# Altium PCB RA08T.PcbDoc
Units mm, origin at the board's own origin, x right, y up, seen from the top; angles counter-clockwise.
Board outline 67 x 42 mm, 2 copper layers (TOP, BOTTOM), stack 1.486 mm thick; 24 components, 20 nets, 92 pads, 159 vias.
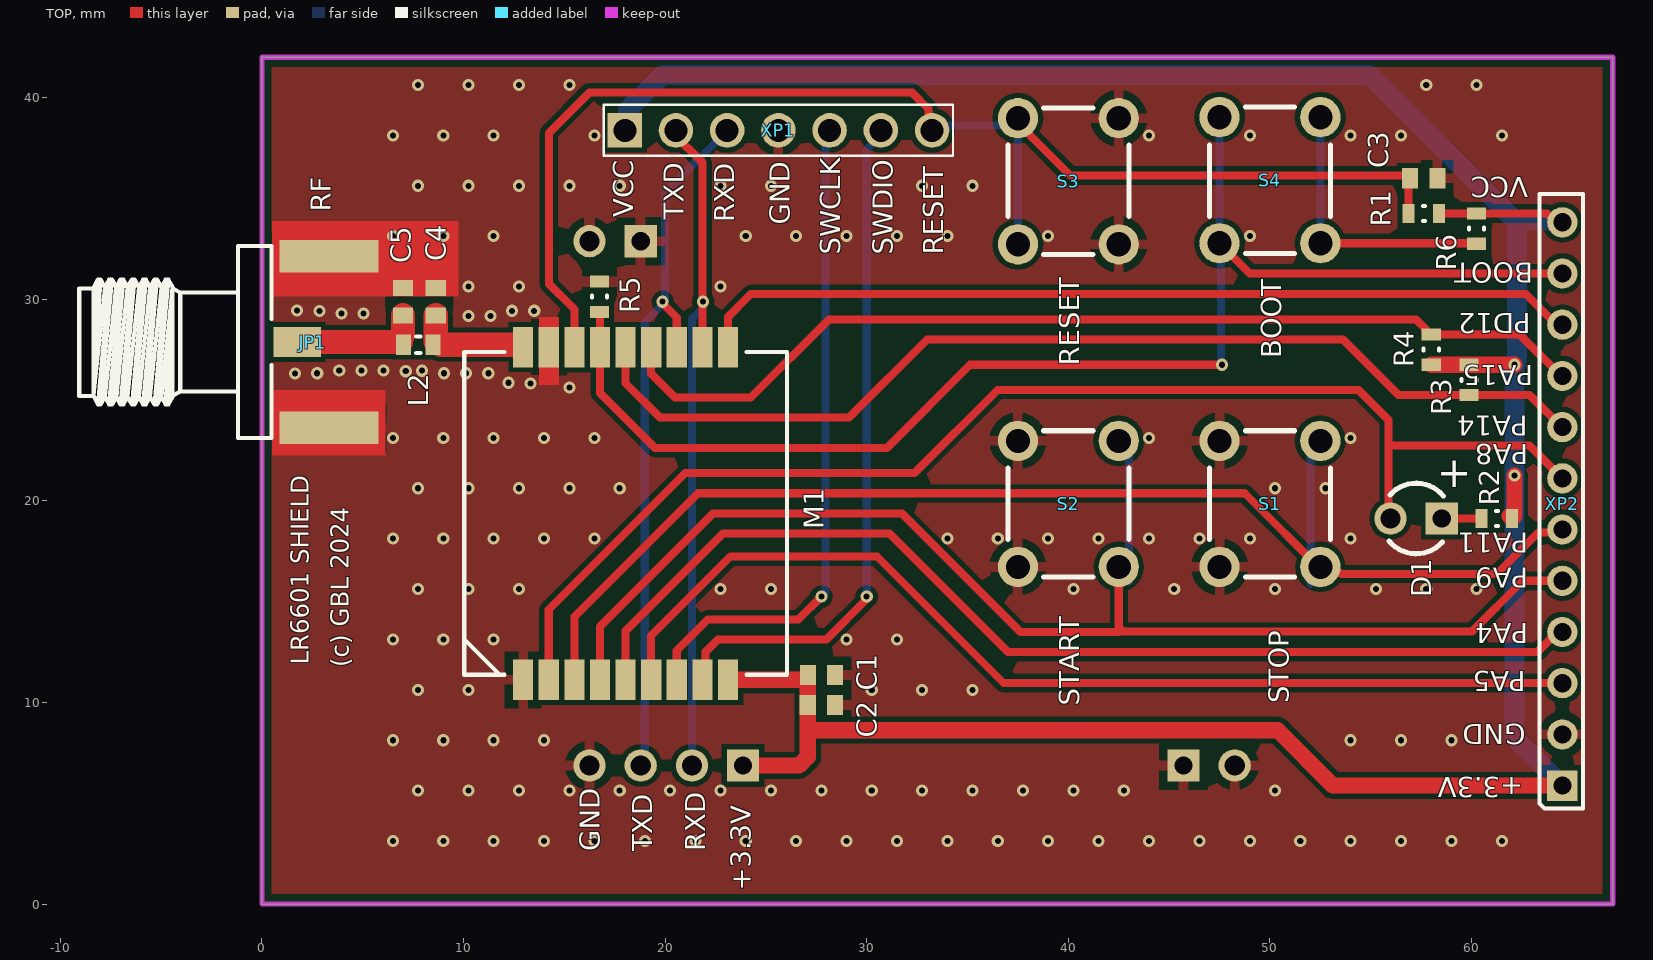
[diagram p0: TOP view]
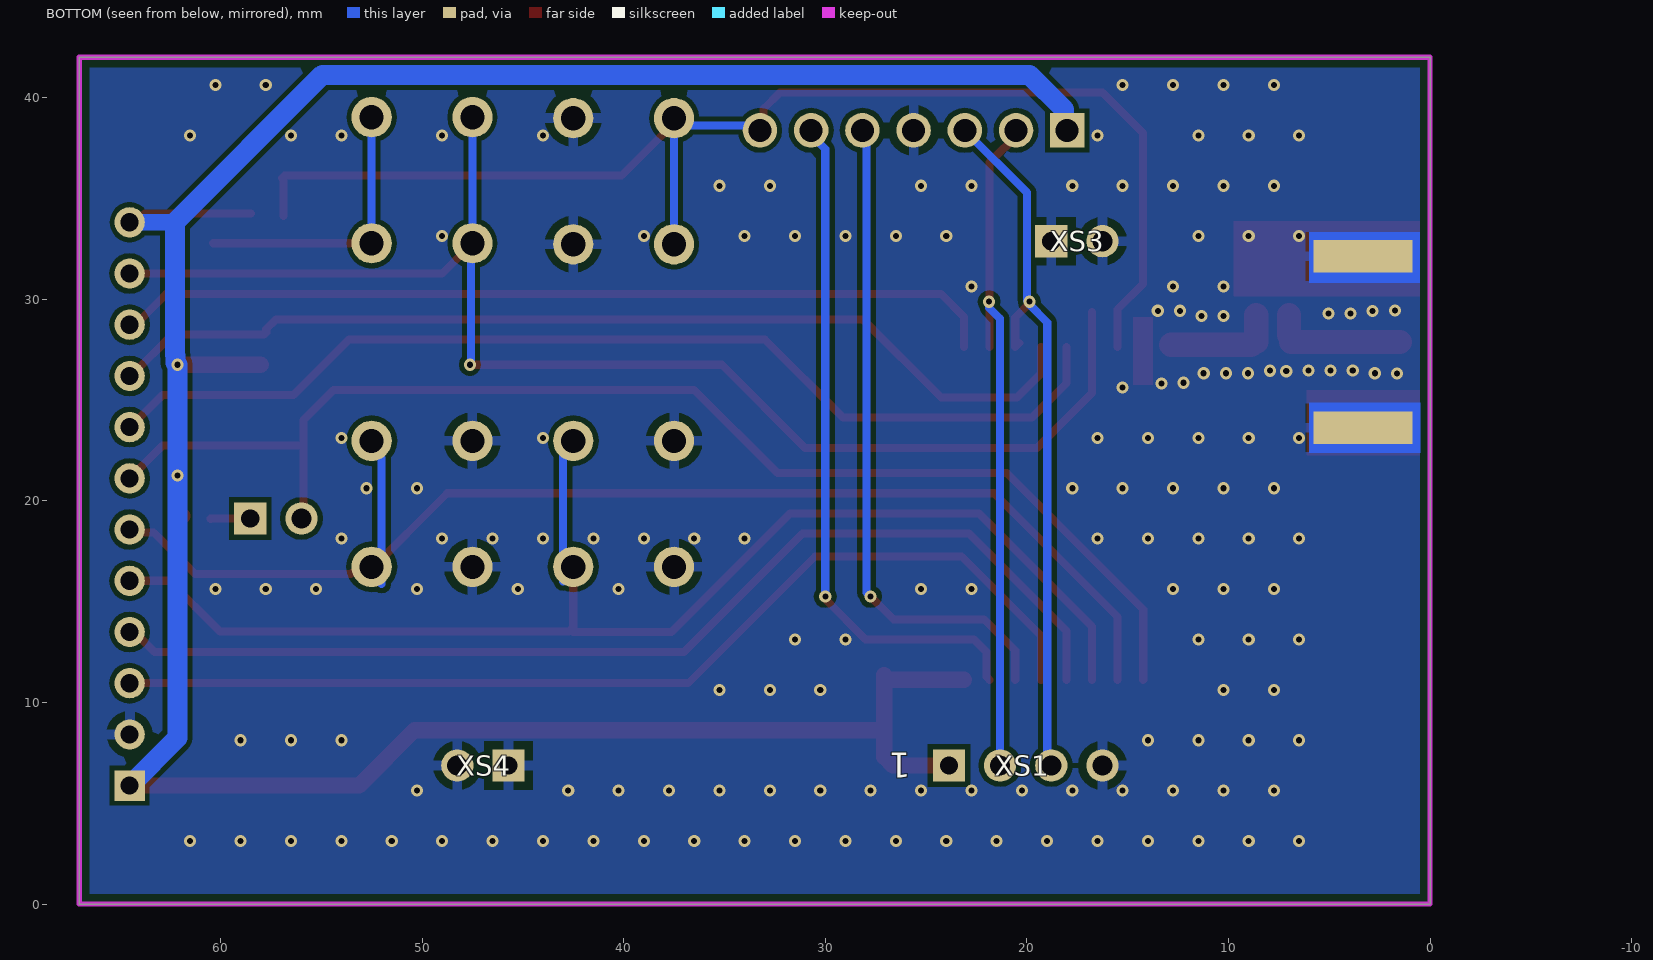
[diagram p1: BOTTOM view, seen from below]
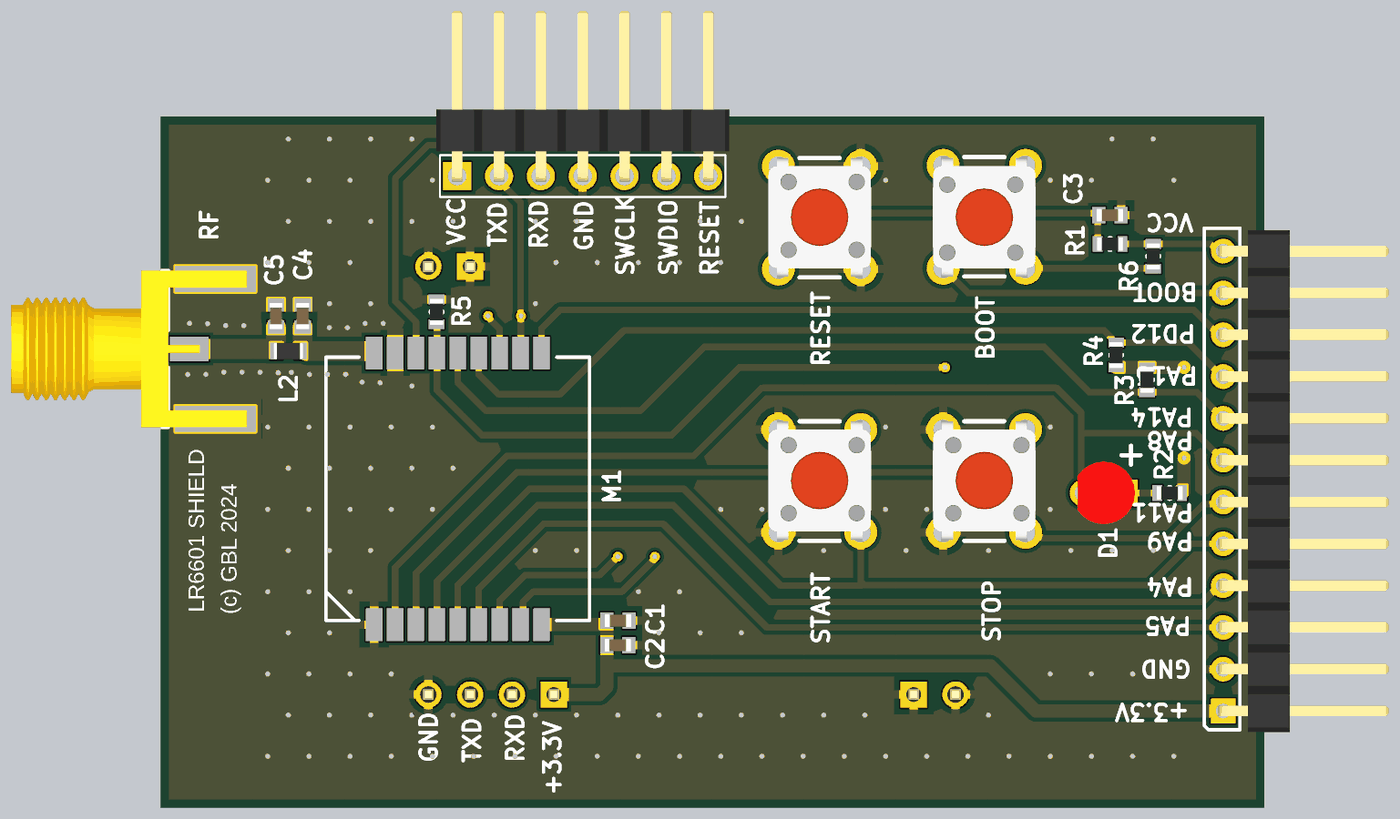
[diagram p2: 3D render of the assembled board from above, using the file's embedded part models]
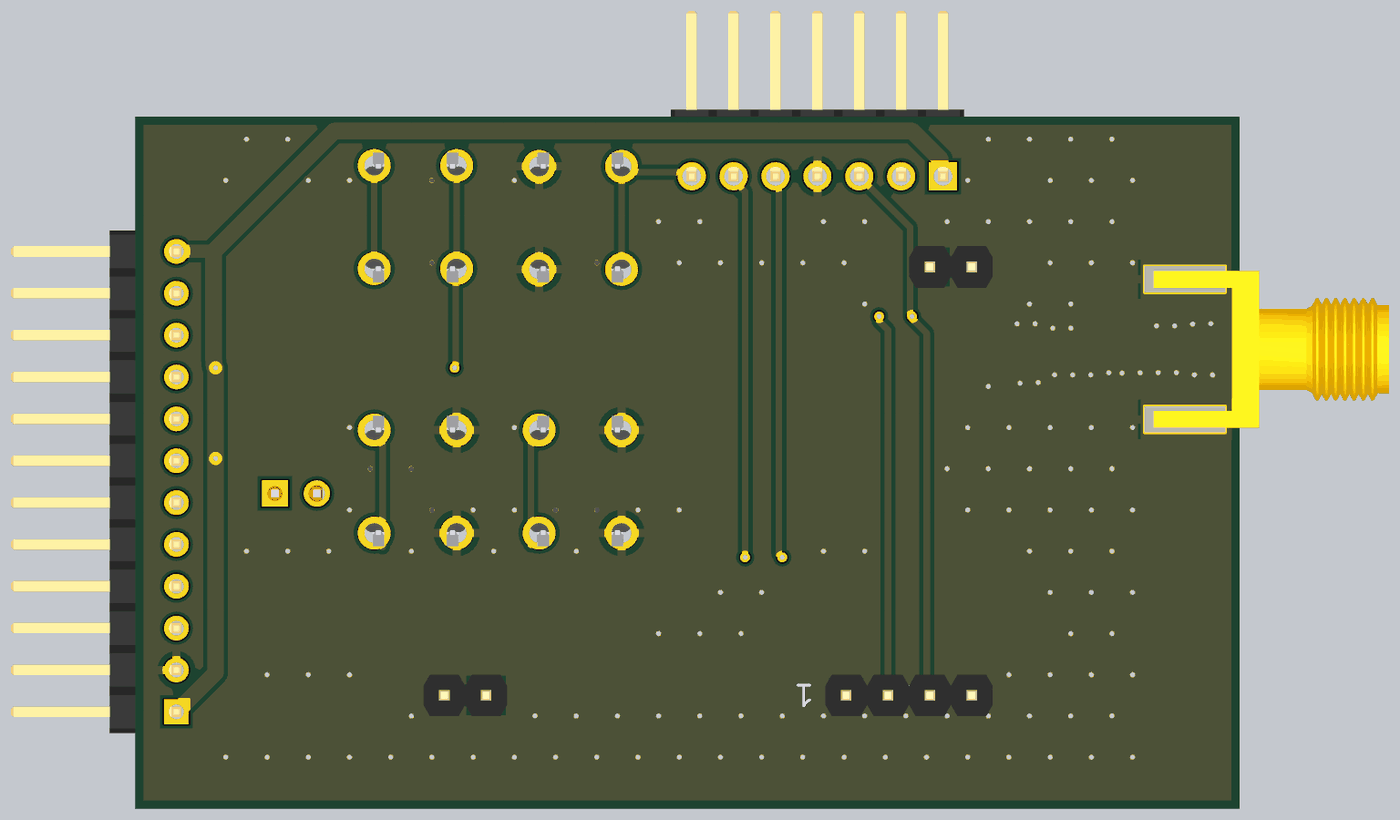
[diagram p3: 3D render of the assembled board from below, using the file's embedded part models]

## Layer stack, top to bottom
Top Solder: solder mask 0.0102, Solder Resist, Dk 3.5
TOP: signal copper 0.018
Dielectric1: core 1.45, FR-4, Dk 4.2
BOTTOM: signal copper 0.018
Bottom Solder: solder mask 0.0102, Solder Resist, Dk 3.5

## Board outline
0,0 67,0 67,42 0,42

## Design rules (kind name [scope] priority, off if disabled: settings)
AssemblyTestPointUsage [All] p1 off:
AssemblyTestpoint [All] p1 off: testpointundercomponent=TRUE minsize=1.016 maxsize=2.54 preferedsize=1.524 minholesize=0 maxholesize=1.016 preferedholesize=0.813 testpointgrid=0.025 usegrid=TRUE gridtolerance=0 allowsidetop=TRUE allowsidebottom=TRUE
BoardOutlineClearance [All] p1: gap=0.5 ignorepadtopadclearanceinfootprint=FALSE
Clearance Clearance_Polygon [InPolygon] p1: gap=0.25 ignorepadtopadclearanceinfootprint=FALSE
Clearance [All] p2: gap=0.2 ignorepadtopadclearanceinfootprint=FALSE
ComponentClearance [All] p1: gap=-5 collisioncheckmode=3 verticalgap=-5 showdistances=TRUE
FabricationTestPointUsage [All] p1 off: valid=0 allowmultiple=FALSE
FabricationTestpoint [All] p1 off: side=3 testpointundercomponent=TRUE minsize=1.016 maxsize=2.54 preferedsize=1.524 minholesize=0 maxholesize=1.016 preferedholesize=0.813 testpointgrid=0.025 allowsidetop=TRUE allowsidebottom=TRUE usegrid=TRUE gridtolerance=0
HoleSize [All] p1: absolutevalues=TRUE maxlimit=8 minlimit=0.025 maxpercent=80.000 minpercent=20.000
HoleToHoleClearance [All] p1: gap=0.25 allowstackedmicrovias=TRUE
MinimumSolderMaskSliver [All] p1: minsoldermaskwidth=0
PlaneClearance [All] p1: clearance=0.5
PlaneConnect [All] p1: planeconnectstyle=Relief reliefexpansion=0.5 reliefentries=4 reliefconductorwidth=0.5 reliefairgap=0.5
PolygonConnect PolygonConnect_1 [All vs (InComponent('C4') AND InComponent('C5'))] p1: thpad.connectstyle=Relief thpad.reliefconductorwidth=0.25 thpad.reliefentries=4 thpad.polygonreliefangle="90 Angle" thpad.airgapwidth=0.25 smdpad.connectstyle=Direct smdpad.reliefconductorwidth=0.254 smdpad.reliefentries=4 smdpad.polygonreliefangle="90 Angle" smdpad.airgapwidth=0.254 via.connectstyle=Direct via.reliefconductorwidth=0.254 via.reliefentries=4 via.polygonreliefangle="90 Angle" via.airgapwidth=0.254
PolygonConnect PolygonConnect_via [isVia] p2: connectstyle=Direct reliefconductorwidth=0.254 reliefentries=4 polygonreliefangle="90 Angle" airgapwidth=0.254
PolygonConnect [All] p3: connectstyle=Relief reliefconductorwidth=0.5 reliefentries=4 polygonreliefangle="90 Angle" airgapwidth=0.4
RoutingCorners [All] p1: cornerstyle=45-Degree minsetback=2.5 maxsetback=2.5
RoutingVias [All] p1: holewidth=0.3 width=0.7 viastyle="Through Hole" minholewidth=0.2 minwidth=0.5 maxholewidth=0.4 maxwidth=0.8
SilkToSilkClearance [All] p1: silktosilkclearance=0
SilkToSolderMaskClearance [IsPad] p1: minsilkscreentomaskgap=-1 clearancetoexposedcopper=TRUE
SolderMaskExpansion [All] p1: expansion=0.1 istentingtop=FALSE
Width [All] p1: maxlimit=2 minlimit=0.15 preferedwidth=0.2 minimp=50.000000 maximp=50.000000 favimp=50.000000
17 further rules are at their usual default settings.

## Components (designator, comment, footprint, x,y, rotation, side; value= is the part's Value field where it differs from the comment)
C1 "1u" C-0603 27.759,11.362 r0 top
C2 "1n" C-0603 27.75,9.875 r0 top
C3 "100n" C-0603 57.625,36 r0 top
C4 "nc" C-0603 8.625,29.875 r90 top
C5 "nc" C-0603 7,29.875 r90 top
D1 "LED3mm" LED_3mm_RED 57.25,19.125 r180 top value=GREEN
JP1 "EM-SA071-GGT" AMPHENOL_132357-11 1.75,27.875 r0 top
L2 "0" L-0603 7.758,27.745 r180 top
M1 "RA-08" LGA18_RA08 18.04,19.375 r90 top
R1 "1k" R-0603 57.63,34.248 r0 top
R2 "1k" R-0603 61.25,19.125 r0 top
R3 "10k" R-0603 59.875,26 r90 top
R4 "10k" R-0603 58,27.5 r270 top
R5 "100k" R-0603 16.75,30.125 r90 top
R6 "1k" R-0603 60.25,33.5 r270 top
S1 "KLS7-TS3602 -3 15-180" BUTT_MIN 50,19.875 r90 top locked
S2 "KLS7-TS3602 -3 15-180" BUTT_MIN 40,19.875 r90 top locked
S3 "KLS7-TS3602 -3 15-180" BUTT_MIN 40,35.875 r90 top locked
S4 "KLS7-TS3602 -3 15-180" BUTT_MIN 50,35.875 r270 top locked
XP1 "Header 7" PLS1-7R 18,38.375 r0 top locked
XP2 "Header 12H" HDR1X12H_1 64.5,5.875 r90 top
XS1 "PLS4" "PLS4 - 3D" 23.87,6.875 r180 bottom locked value={Value}
XS3 "PLS2" "PLS2 - 3D" 18.79,32.875 r180 bottom locked value={Value}
XS4 "PLS2" "PLS2 - 3D" 45.71,6.875 r0 bottom locked value={Value}

## Footprints (in the part's own frame and the unit in brackets; to place one, negate y for a bottom-side part, rotate by r counter-clockwise, add the part's x,y. Pads: shape width x height; smd on the part's side, far side on the other; paste and mask are expansions set on the pad)
AMPHENOL_132357-11 [mm] "SMA End Launch Jack for 1.58mm PCB, 50 Ohm, Flat Tab Contact"
  rect 2.35x1.5 smd: 1(0,0)
  rect 4.9x1.6 smd far side: 2(1.575,-4.25) 2(1.575,4.25)
  rect 4.9x1.6 smd: 2(1.575,-4.25) 2(1.575,4.25)
  silkscreen extent -10.81,-4.76 -1.28,4.76, body extent -10.8,-4.76 3.48,4.76, height 4.08
BUTT_MIN [mm]
  round 2 hole 1.2 mask+0.05: 1(-3.15,-2.5) 1(3.1,-2.5) 2(-3.15,2.5) 2(3.1,2.5)
  silkscreen extent -3.66,-3 3.6,3, body extent -3.95,-3.1 3.95,3.1, height 7.01
C-0603 [mm] "Chip Capacitor, 2-Leads, Body 1,60x0,80mm, IPC Medium Density"
  rect 0.8x1 smd: 1(-0.675,0) 2(0.675,0)
  body extent -0.8,-0.4 0.8,0.4, height 0.8
HDR1X12H_1 [mm] "Connector; Header; 12 Position; Right Angle"
  rect 1.5x1.5 hole 0.9: 1(0,0)
  round 1.5 hole 0.9: 2(2.54,0) 3(5.08,0) 4(7.62,0) 5(10.16,0) 6(12.7,0) 7(15.24,0) 8(17.78,0) 9(20.32,0) 10(22.86,0) 11(25.4,0) 12(27.94,0)
  silkscreen extent -1.14,-1.02 29.34,1.14, body extent -1.27,-10.04 29.21,0.32, height 2.54
L-0603 [mm] "Chip Inductor, 2-Leads, Body 1,60x0,80mm, IPC Medium Density"
  rect 0.74x1.02 smd: 1(-0.735,0) 2(0.735,0)
  silkscreen extent -0.1,-0.41 0.1,0.41, body extent -0.9,-0.5 0.9,0.5, height 1
LED_3mm_RED [mm]
  rect 1.6x1.6 hole 0.9: 1(-1.27,0)
  round 1.6 hole 1: 2(1.27,0)
  silkscreen extent -1.34,-1.75 1.34,1.75, body extent -1.9,-1.9 1.6,1.9, height 5.75
LGA18_RA08 [mm]
  rect 2x1 smd: 1(-8.25,5.08) 2(-8.25,3.81) 3(-8.25,2.54) 4(-8.25,1.27) 5(-8.25,0) 6(-8.25,-1.27) 7(-8.25,-2.54) 8(-8.25,-3.81) 9(-8.25,-5.08) 10(8.25,-5.08) 11(8.25,-3.81) 12(8.25,-2.54) 13(8.25,-1.27) 14(8.25,0) 15(8.25,1.27) 16(8.25,2.54) 17(8.25,3.81) 18(8.25,5.08)
  silkscreen extent -8,-8 8,8, body extent -7.5,-7.5 7.5,7.53, height 1.5
PLS1-7R [mm] "Header, Vertical, 2.54 mm pitch; 0.70 mm lead width, 7 pins, 1 row, 7 pins per row, 16.51 mm L X 2.54 mm W X 7.54 mm H body"
  rect 1.71x1.71 hole 1.14 paste-1.71: 1(0,0)
  round 1.71 hole 1.14 paste-1.71: 2(2.54,0) 3(5.08,0) 4(7.62,0) 5(10.16,0) 6(12.7,0) 7(15.24,0)
  silkscreen extent -1.04,-1.27 16.28,1.27, body extent -1.27,-0.32 16.51,10.04, height 2.54
"PLS2 - 3D" [mm]
  rect 1.6x1.6 hole 0.9: 1(0,0)
  round 1.6 hole 1: 2(2.54,0)
  body extent -1.27,-1.27 3.81,1.27, height 8.8
"PLS4 - 3D" [mm]
  rect 1.6x1.6 hole 0.9: 1(0,0)
  round 1.6 hole 1: 2(2.54,0) 3(5.08,0) 4(7.62,0)
  body extent -1.27,-1.27 8.89,1.27, height 8.8
R-0603 [mm] "Chip Resistor, 2-Leads, Body 1,60x0,82mm, IPC Medium Density"
  rect 0.6x0.95 smd: 1(-0.75,0) 2(0.75,0)
  silkscreen extent -0.05,-0.38 0.05,0.38, body extent -0.8,-0.4 0.8,0.4, height 0.45

## Part data
C1 C2 C3 C4 C5: library part CAPN, Voltage=50V, Вид=Конденсатор, Точність/група=NP0
JP1: library part SMA, "SMA Female R/A PCB Mount", Вид=Роз'єм
L2: library part L, Вид=Індуктивність
R1 R2 R3 R4 R5 R6: library part RES, Вид=Резистор, Точність/група=5%
S1 S2 S3 S4: library part SW-1, Вид=Кнопка
XP1: "Header, 7-Pin", LatestRevisionDate=17-Jul-2002, LatestRevisionNote="Re-released for DXP Platform.", Publisher="Altium Limited"
XP2: "Header, 12-Pin, Right Angle", LatestRevisionDate=17-Jul-2002, LatestRevisionNote="Re-released for DXP Platform.", Publisher="Altium Limited"
D1 XS1 XS3 XS4: Mounting  Method=THT

## Via types
v1: diameter 0.6, hole 0.3, TOP to BOTTOM, tented both sides, 152 vias
v2: diameter 0.6, hole 0.3, TOP to BOTTOM, 7 vias

## Nets (pads, with @x,y where several pads share a name; then routed paths per layer and width w, separated by ;. In a path a pad name is that pad's centre, name@x,y a point inside that pad or via, vN(x,y) a via of type N, cw(c..) or ccw(c..) an arc to the next point about the centre after c; other vN are vias at no path point)
BOOT: M1.15 R5.1 S4.1 XP2.11 | length 67.7
  TOP w0.2: R5.1 R5.1@16.77,29.355
  TOP w0.4: R5.1@16.77,29.355 M1.15 16.77,25.355 19.5,22.625 31,22.625 35.125,26.75 v2(47.625,26.75) ; S4.1@47.5,32.775 49,31.275 XP2.11
  BOTTOM w0.4: S4.1@47.5,39.025 47.5,32.775 47.562,32.712 47.562,26.813 v2(47.625,26.75)
GND: C1.2 C2.2 C3.2 C4.2 C5.2 JP1.2 M1.1 M1.17 R5.2 S1.2 S2.2 S3.1 XP1.4 XP2.2 XS1.4 XS3.1 XS3.2 XS4.1 XS4.2
  other v1: 6.5,3.125 9,3.125 11.5,3.125 14,3.125 16.5,3.125 19,3.125 21.5,3.125 24,3.125 26.5,3.125 29,3.125 31.5,3.125 34,3.125 36.5,3.125 39,3.125 41.5,3.125 44,3.125 46.5,3.125 49,3.125 51.5,3.125 54,3.125 56.5,3.125 59,3.125 61.5,3.125 7.75,5.625 10.25,5.625 12.75,5.625 15.25,5.625 17.75,5.625 20.25,5.625 22.75,5.625 25.25,5.625 27.75,5.625 30.25,5.625 32.75,5.625 35.25,5.625 37.75,5.625 40.25,5.625 42.75,5.625 50.25,5.625 6.5,8.125 9,8.125 11.5,8.125 14,8.125 54,8.125 56.5,8.125 59,8.125 7.75,10.625 10.25,10.625 30.25,10.625 32.75,10.625 35.25,10.625 6.5,13.125 9,13.125 11.5,13.125 29,13.125 31.5,13.125 7.75,15.625 10.25,15.625 12.75,15.625 22.75,15.625 25.25,15.625 40.25,15.625 45.25,15.625 50.25,15.625 55.25,15.625 57.75,15.625 60.25,15.625 6.5,18.125 9,18.125 11.5,18.125 14,18.125 16.5,18.125 34,18.125 36.5,18.125 39,18.125 41.5,18.125 44,18.125 46.5,18.125 49,18.125 54,18.125 7.75,20.625 10.25,20.625 12.75,20.625 15.25,20.625 17.75,20.625 50.25,20.625 52.75,20.625 6.5,23.125 9,23.125 11.5,23.125 14,23.125 16.5,23.125 44,23.125 54,23.125 15.25,25.625 13.325,25.818 12.226,25.856 1.647,26.318 2.747,26.328 9.032,26.327 10.132,26.327 11.232,26.327 7.139,26.429 3.839,26.456 4.939,26.456 6.039,26.456 7.939,26.453 10.241,29.164 11.341,29.164 3.947,29.294 5.047,29.294 2.853,29.409 1.753,29.432 12.41,29.425 13.51,29.425 10.25,30.625 12.75,30.625 22.75,30.625 6.5,33.125 9,33.125 11.5,33.125 24,33.125 26.5,33.125 29,33.125 31.5,33.125 34,33.125 39,33.125 49,33.125 7.75,35.625 10.25,35.625 12.75,35.625 15.25,35.625 17.75,35.625 22.75,35.625 25.25,35.625 32.75,35.625 35.25,35.625 6.5,38.125 9,38.125 11.5,38.125 16.5,38.125 44,38.125 49,38.125 54,38.125 56.5,38.125 61.5,38.125 7.75,40.625 10.25,40.625 12.75,40.625 15.25,40.625 57.75,40.625 60.25,40.625
NetC4_1: C4.1 L2.1 M1.18 | length 5.8
  TOP w0.2: L2.1 L2.1@8.625,27.877 ; L2.1@8.557,27.682 L2.1@8.682,27.557 ; M1.18@12.84,27.745 M1.18
  TOP w1.2: L2.1@8.625,27.877 C4.1 ; 8.87,27.745 M1.18@12.84,27.745
NetC5_1: C5.1 JP1.1 L2.2 | length 6.4
  TOP w1.2: JP1.1@1.5,27.875 L2.2@6.894,27.875 ; L2.2@7,28.231 C5.1
NetD1_1: D1.1 R2.1 | length 2
  TOP w0.4: D1.1 60.46,19.125 60.48,19.105 R2.1
NetR6_2: R6.2 S4.2 | length 14.1
  TOP w0.4: S4.2@52.5,32.775 R6.2@60.375,32.775
  BOTTOM w0.4: S4.2@52.5,32.775 S4.2@52.5,39.025
NRST: C3.1 M1.16 R1.1 S3.2 XP1.7 | length 65.7
  TOP w0.2: C3.1@56.875,35.925 C3.1
  TOP w0.4: M1.16 15.5,29.5 14.25,30.75 14.25,38.25 16.25,40.25 32.25,40.25 33.054,39.446 33.054,38.561 XP1.7 ; S3.2@37.378,38.853 40.106,36.125 56.825,36.125 C3.1 ; R1.1@56.875,34.125 C3.1@56.875,35.925
  BOTTOM w0.4: XP1.7 33.49,38.625 36.717,38.625 37.067,38.975 37.5,38.975 S3.2@37.5,32.725
PA4: M1.5 XP2.4 | length 53.7
  TOP w0.4: M1.5 18.04,13.54 22.875,18.375 31.125,18.375 37,12.5 63.26,12.5 64.255,13.495 XP2.4
PA5: M1.6 XP2.3 | length 51.6
  TOP w0.4: M1.6 19.31,13.31 23.25,17.25 30.5,17.25 36.795,10.955 XP2.3
PA8: D1.2 M1.2 XP2.7 | length 64.5
  TOP w0.4: M1.2 14.23,14.605 21,21.375 32.375,21.375 36.5,25.5 54.383,25.5 55.875,24.008 55.875,22.75 ; D1.2 55.875,19.23 55.875,22.75 ; XP2.7 62.865,22.75 55.875,22.75
PA9: M1.4 S2.1 XP2.5 | length 65.7
  TOP w0.4: M1.4 16.77,13.77 22.375,19.375 31.75,19.375 37.625,13.5 42.5,13.5 42.625,13.625 ; S2.1@42.5,16.725 42.5,13.75 42.625,13.625 ; XP2.5 62.535,16.035 60.016,13.516 42.734,13.516 42.625,13.625
  BOTTOM w0.4: S2.1@43,16 S2.1@43,22.25
PA11: M1.3 S1.1 XP2.6 | length 63.5
  TOP w0.4: M1.3 15.5,14.25 21.625,20.375 48.75,20.375 52.706,16.419 53.49,16.419 53.534,16.375 61.25,16.375 63.314,18.439 64.364,18.439 XP2.6
  BOTTOM w0.4: S1.1@52,15.875 S1.1@52,22.125
PA14: M1.14 R3.1 XP2.8 | length 52.6
  TOP w0.4: M1.14 18.04,25.835 19.75,24.125 29.125,24.125 33,28 53.625,28 56.375,25.25 R3.1 62.875,25.25 XP2.8@64.625,23.5
PA15: M1.13 R4.1 XP2.9 | length 50
  TOP w0.4: M1.13 19.31,26.315 20.5,25.125 24.25,25.125 28.125,29 57.25,29 57.725,28.525 57.725,28.35 57.825,28.25 62.375,28.25 64.375,26.25 XP2.9@64.465,26.16 ; XP2.9 XP2.9@64.5,26.375
PD12: M1.10 XP2.10 | length 44
  TOP w0.4: M1.10 23.12,29.12 24.25,30.25 62.687,30.25 64.202,28.735 XP2.10
RXD: M1.12 XP1.3 XS1.3 | length 36.1
  TOP w0.4: v2(19.875,29.875) 19.875,29.8 20.58,29.095 M1.12 M1.12@20.38,27.825
  BOTTOM w0.4: XS1.3 18.991,7.076 18.991,28.85 19.899,29.759 19.899,29.851 19.99,29.941 19.99,35.285 XP1.3
SWCLK: M1.7 XP1.5 | length 33
  TOP w0.4: M1.7 20.58,12.58 22.125,14.125 26.625,14.125 v2(27.75,15.25)
  BOTTOM w0.4: v2(27.75,15.25) 27.955,15.455 27.955,38.17 XP1.5
SWDIO: M1.8 XP1.6 | length 33.9
  TOP w0.4: M1.8 22,11.275 22,12.5 22.625,13.125 28,13.125 v2@30,15.125
  BOTTOM w0.4: v2(30,15.25) 30,37.442 30.7,38.142 XP1.6
TXD: M1.11 XP1.2 XS1.2 | length 34.5
  TOP w0.4: XP1.2@20.375,38.25 21.85,36.775 21.85,29.9 v2(21.875,29.875) 21.863,29.863 21.863,27.638 M1.11
  BOTTOM w0.4: XS1.2 21.33,29.032 21.875,29.577 v2(21.875,29.875)
VCC: C1.1 C2.1 M1.9 R1.2 R2.2 R3.2 R4.2 R6.1 XP1.1 XP2.1 XP2.12 XS1.1 | length 142.8
  TOP w0.4: R1.2@58.475,34.25 R6.1 63.733,34.25 64.168,33.815 XP2.12
  TOP w0.8: M1.9 26.847,11.125 C1.1@27.075,11.353 ; XS1.1 26.65,6.875 27.075,7.3 27.075,8.625 C2.1 C1.1@27.075,11.353 ; C1.1 C1.1@27.075,11.353 ; 27.125,8.625 50.375,8.625 53.125,5.875 XP2.1 ; R4.2 R3.2 v2(62.125,26.75) ; R2.2@61.875,19.25 R2.2 62.125,19.25 v2(62.125,21.25)
  BOTTOM w0.2: XP1.1 XP1.1@18.163,38.538
  BOTTOM w0.8: 62.25,33.815 XP2.12
  BOTTOM w1: XP1.1@18.163,38.538 18.163,39.413 19.875,41.125 54.94,41.125 62.25,33.815 62.25,27.229 62.221,27.199 62.221,26.846 v2(62.125,26.75) v2(62.125,21.25) 62.125,8.25 XP2.1

## Polygon pours and split planes (outlines as drawn)
GND on TOP "gnd_top" (solid, remove dead copper, pour order 0): 67,41.5 67,0 0.5,0 0.5,41.5
GND on BOTTOM "gnd_bott" (solid, remove dead copper, pour order 2): 0,42 0,0 67,0 67,42

## Keep-outs
Keep-Out Layer:
  the board outline again, w0.254

## Other copper
TOP:
  rectangle net GND: 0.5,22.25 6.125,25.5
  rectangle net GND: 0.51,30.125 9.75,33.875
  rectangle net GND: 13.75,25.75 14.75,29.125
BOTTOM:
  rectangle net GND: 0.475,22.375 6,24.875
  rectangle net GND: 0.51,30.8 6.021,33.325

## Silkscreen, mask and mechanical layers (free items; w line width, h text height)
Top Overlay:
  text "VCC" at 62.8,36.05 h1 r180
  text "RF" at 3.425,34.325 h1 r90
  text "VCC" at 18.425,34.075 h1 r90
  text "TXD" at 20.925,33.95 h1 r90
  text "RXD" at 23.425,33.825 h1 r90
  text "GND" at 26.175,33.7 h1 r90
  text "SWCLK" at 28.675,32.2 h1 r90
  text "SWDIO" at 31.3,32.2 h1 r90
  text "RESET" at 33.8,32.2 h1 r90
  text "BOOT" at 63.05,31.816 h1 r180
  text "PD12" at 62.925,29.3 h1 r180
  text "BOOT" at 50.55,27.075 h1 r90
  text "PA15" at 63.05,26.736 h1 r180
  text "RESET" at 40.55,26.7 h1 r90
  text "PA14" at 62.789,24.231 h1 r180
  text "PA8" at 62.8,22.8 h1 r180
  text "PA11" at 62.8,18.425 h1 r180
  text "PA9" at 62.8,16.675 h1 r180
  text "PA4" at 62.8,13.925 h1 r180
  text "LR6601 SHIELD" at 2.625,11.875 h1.52 r90
  text "(c) GBL 2024" at 4.604,11.75 h1.52 r90
  text "PA5" at 62.675,11.55 h1 r180
  text "STOP" at 50.925,9.95 h1 r90
  text "START" at 40.55,9.825 h1 r90
  text "GND" at 62.675,8.925 h1 r180
  text "+3.3V" at 62.55,6.3 h1 r180
  text "GND" at 16.75,2.625 h1 r90
  text "TXD" at 19.375,2.625 h1 r90
  text "RXD" at 22,2.625 h1 r90
  text "+3.3V" at 24.25,0.65 h1 r90
Board:
  the board outline again, w0.2

## Text inside footprints (layer, text, board x,y; h text height)
D1: Top Overlay "+" at 60,22 h1.5 r180
XS1: Bottom Overlay "1" at 25.75,7.5 h1.25 r180